# EAGLE board untitled (EAGLE 7.6.0)
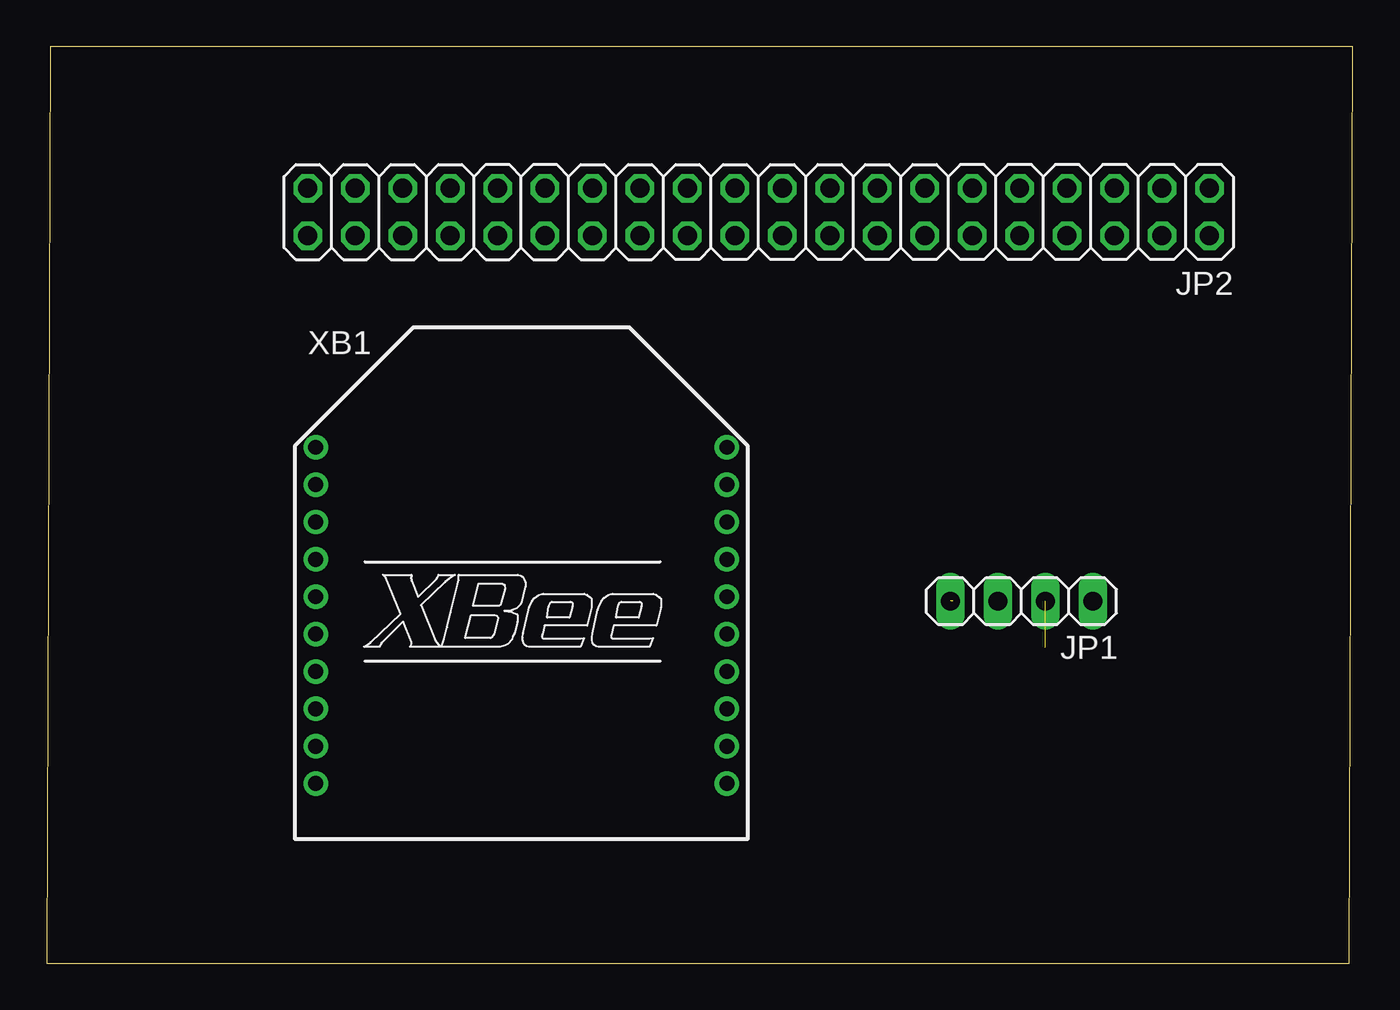
[diagram p0: board, top side]
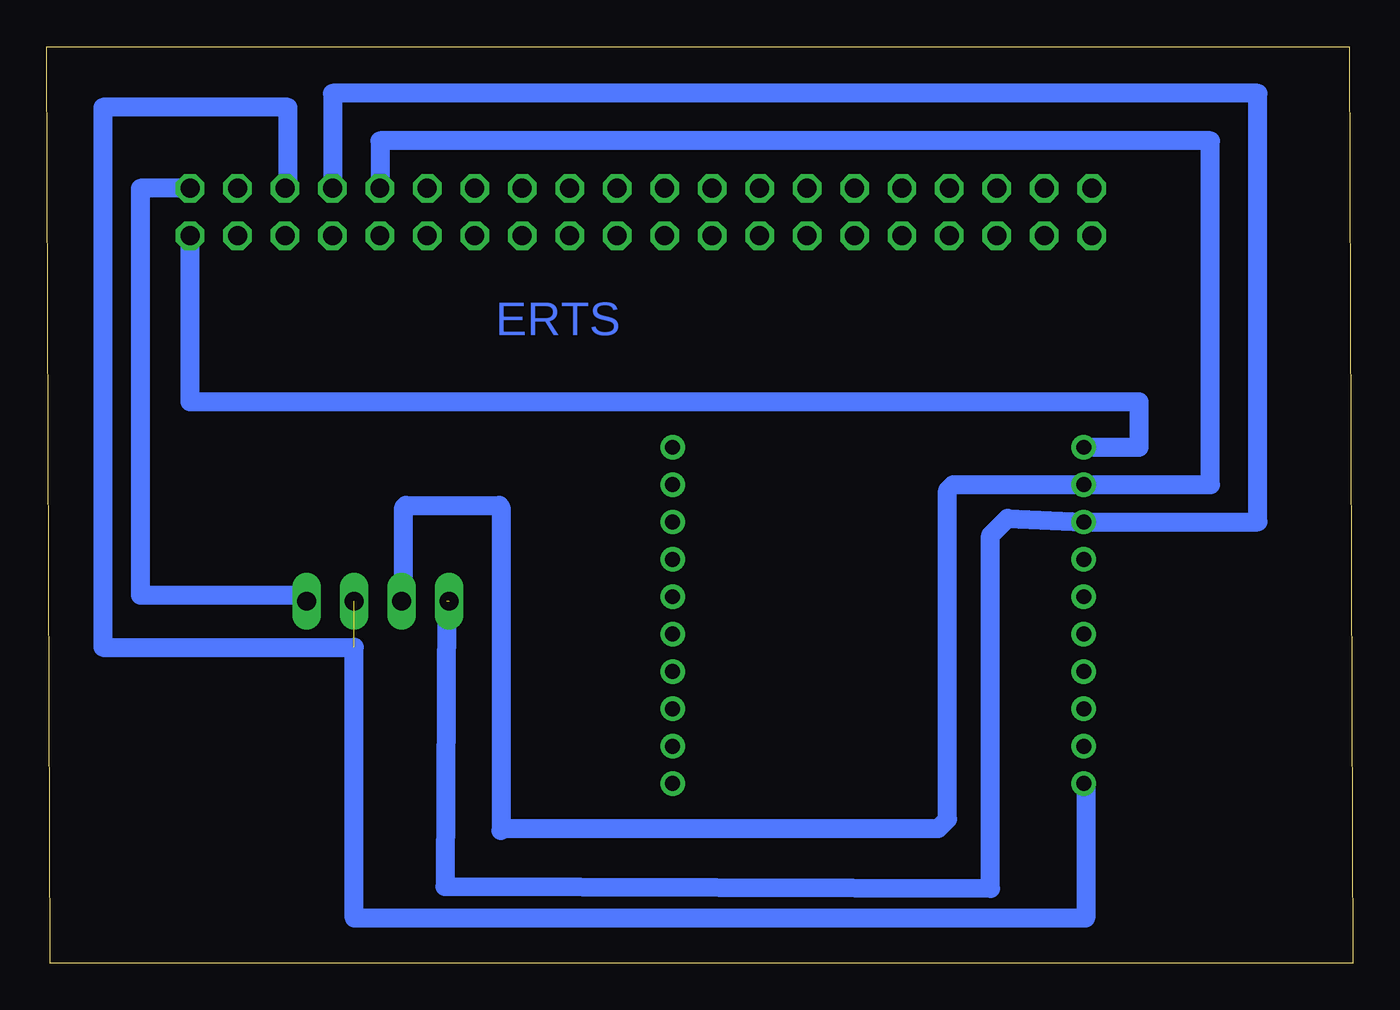
[diagram p1: board, bottom side, seen from below]

Size 69.9 x 49.05 mm. Coordinates in mm from the lower left corner, seen from the top.
Outline: 0,0 69.7,0 69.9,49.05 0.2,49.05 0,0
Copper layers (1*16): Top 0.035mm / dielectric 1.5mm / Bottom 0.035mm
Design rules "default": minimum track width 10mil, minimum drill 24mil, track to track 8mil, track to pad 8mil, pad to pad 8mil, via to via 8mil, smd to smd 8mil, copper to edge 40mil, drill to drill 8mil, minimum pad ring 10mil, minimum via ring 8mil, stop-mask expansion 4mil, vias tented up to drill 0mil, thermal gap 10mil

## Footprints (pad centres in the part's own frame; a part is rotated, then mirrored left to right if it is on the bottom)
1X04 = drill 1.016 long: 1 -3.81,0; 2 -1.27,0; 3 1.27,0; 4 3.81,0
2X20 = drill 1.016 octagon: 1 -24.13,-1.27; 2 -24.13,1.27; 3 -21.59,-1.27; 4 -21.59,1.27; 5 -19.05,-1.27; 6 -19.05,1.27; 7 -16.51,-1.27; 8 -16.51,1.27; 9 -13.97,-1.27; 10 -13.97,1.27; 11 -11.43,-1.27; 12 -11.43,1.27; 13 -8.89,-1.27; 14 -8.89,1.27; 15 -6.35,-1.27; 16 -6.35,1.27; 17 -3.81,-1.27; 18 -3.81,1.27; 19 -1.27,-1.27; 20 -1.27,1.27; 21 1.27,-1.27; 22 1.27,1.27; 23 3.81,-1.27; 24 3.81,1.27; 25 6.35,-1.27; 26 6.35,1.27; 27 8.89,-1.27; 28 8.89,1.27; 29 11.43,-1.27; 30 11.43,1.27; 31 13.97,-1.27; 32 13.97,1.27; 33 16.51,-1.27; 34 16.51,1.27; 35 19.05,-1.27; 36 19.05,1.27; 37 21.59,-1.27; 38 21.59,1.27; 39 24.13,-1.27; 40 24.13,1.27
XBEE = drill 0.8 pad 1.27: 1 -11,9; 2 -11,7; 3 -11,5; 4 -11,3; 5 -11,1; 6 -11,-1; 7 -11,-3; 8 -11,-5; 9 -11,-7; 10 -11,-9; 11 11,-9; 12 11,-7; 13 11,-5; 14 11,-3; 15 11,-1; 16 11,1; 17 11,3; 18 11,5; 19 11,7; 20 11,9

## Placement (x,y rotation side)
JP1  [1X04]  52.17,19.37 180 top
JP2  [2X20]  38.1,40.2 180 top
XB1  XBEE  [XBEE]  25.4,18.61 0 top

## Library data of the parts
JP1 JP2 = pinhead
XB1 = maxstream; MPN: XBP24-Z7UIT-004; OC_FARNELL: 1751799; OC_NEWARK: 34R5507

## Nets
N$1: JP2.2 XB1.1
N$2: JP1.2 JP2.5 XB1.10
N$4: JP1.3 JP2.9 XB1.2
N$5: JP1.1 JP2.1
N$6: JP1.4 JP2.7 XB1.3

## Tracks (layer width: path | path; a pad name or v marks a point on that pad's centre or on a via)
N$1
  Bottom 1.016: XB1.1 11.43,27.61 11.43,30.04 62.23,30.04 JP2.2
N$2  (1 unrouted)
  Bottom 1.016: XB1.10 14.29,9.61 14.29,2.4 53.44,2.4 53.44,16.9 66.89,16.9 66.89,45.8 56.99,45.8 56.99,41.47 JP2.5
N$4
  Bottom 1.016: JP2.9 52.07,44.01 7.62,44.01 7.62,25.61 XB1.2 21.38,25.61 21.69,25.3 21.69,7.7 22.19,7.2 45.49,7.2 45.59,7.1 45.59,24.4 45.69,24.5 50.69,24.5 50.79,24.4 50.79,19.48 JP1.3
N$5
  Bottom 1.016: JP2.1 64.89,41.47 64.89,19.7 55.98,19.7 JP1.1
N$6  (1 unrouted)
  Bottom 1.016: JP2.7 54.61,46.55 5.08,46.55 5.08,23.61 XB1.3 18.48,23.81 19.39,22.9 19.39,4 48.59,4.1 48.49,19.37

## Text on the board
Bottom: ERTS